# Altium PCB Ramp V1-4交流+微步進驅動器+電源.PCBDOC
Units mil, origin at the board's own origin, x right, y up, seen from the top; angles counter-clockwise.
Board outline 13794 x 4636 mil, 2 copper layers (Top Layer, Bottom Layer); 113 components, 119 nets, 585 pads, 118 vias.
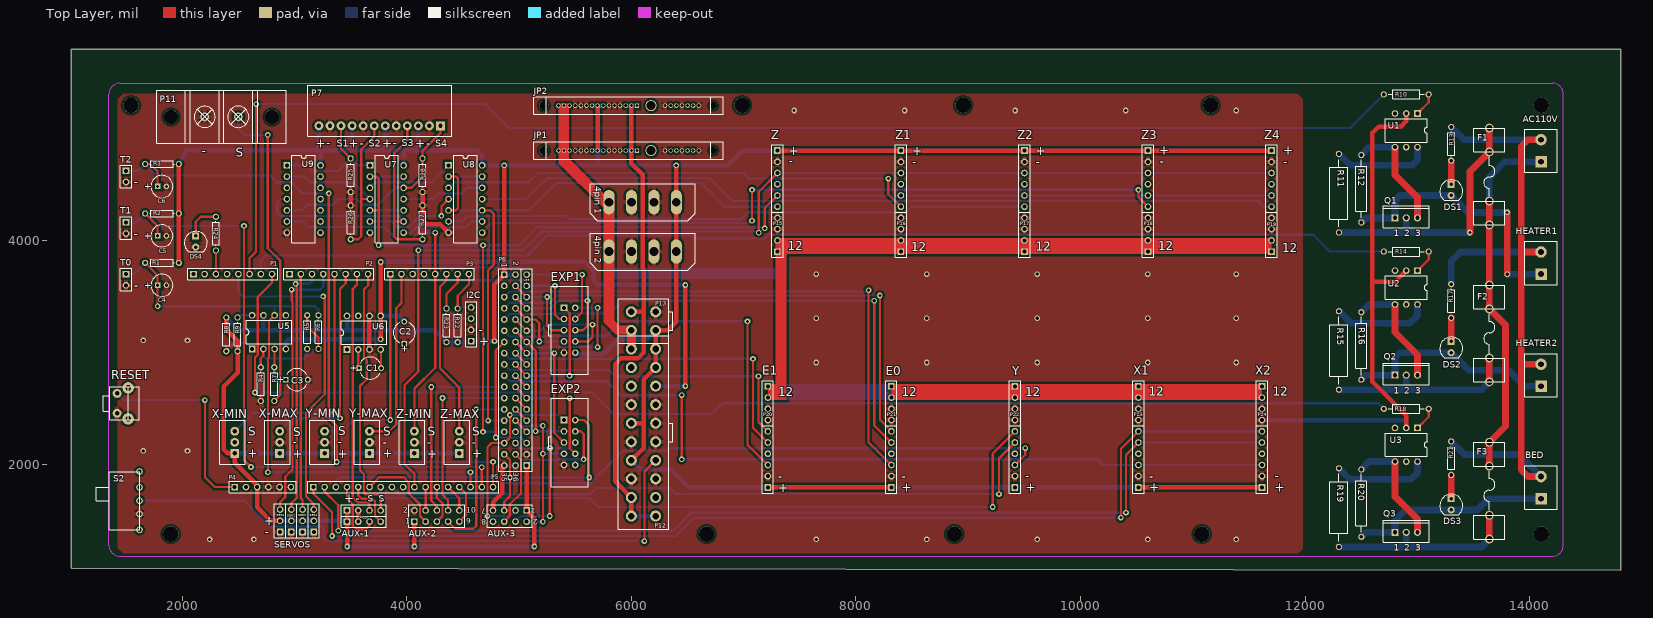
[diagram p0: Top Layer view]
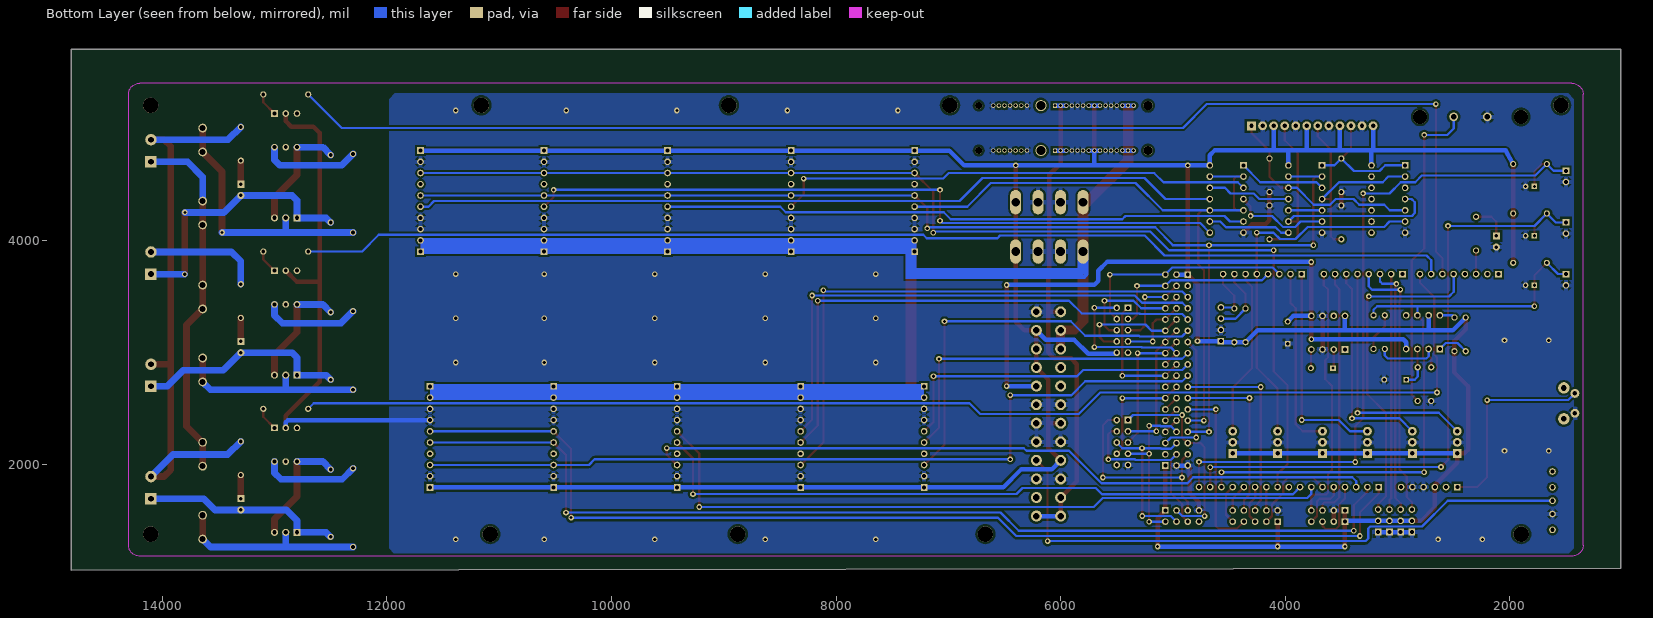
[diagram p1: Bottom Layer view, seen from below]

## Layer stack, top to bottom
Top Layer: signal copper 1.4
Dielectric: dielectric 12.6, FR-4, Dk 4.8
Bottom Layer: signal copper 1.4

## Board outline
1014,1080 1014,5700 14808,5700 14808,1064

## Design rules (kind name [scope] priority, off if disabled: settings)
Clearance [All] p1: gap=10
ComponentClearance [All] p1: gap=10 collisioncheckmode=0
HoleSize [All] p1: absolutevalues=TRUE maxlimit=150 minlimit=1 maxpercent=80.000 minpercent=20.000
PlaneConnect [All] p1: planeconnectstyle=Relief reliefexpansion=20 reliefentries=2 reliefconductorwidth=10 reliefairgap=10
PolygonConnect [All] p1: connectstyle=Relief reliefconductorwidth=40 reliefentries=4 polygonreliefangle="90 Angle"
RoutingVias [All] p1: holewidth=28 width=50 viastyle="Through Hole" minholewidth=28 minwidth=50 maxholewidth=28 maxwidth=50
SolderMaskExpansion [All] p1: expansion=4
TestPointUsage [All] p1: valid=0 allowmultiple=FALSE
Testpoint [All] p1: side=15 testpointundercomponent=TRUE minsize=40 maxsize=100 preferedsize=60 minholesize=0 maxholesize=40 preferedholesize=32 testpointgrid=1 style=1023 order=-539222988
Width AC110V [InNetClass('AC 110V')] p1: maxlimit=60 minlimit=10 preferedwidth=60
Width power [InNetClass('power')] p2: maxlimit=60 minlimit=10 preferedwidth=40
Width [All] p3: maxlimit=60 minlimit=10 preferedwidth=20
15 further rules are at their usual default settings.

## Classes and differential pairs
net class AC110V: NetAC110V_1 NetAC110V_2 NetBED_1 NetDS1_1 NetDS1_2 NetDS2_1 NetDS2_2 NetDS3_1 NetF1_1 NetF2_1 NetF3_1 NetQ1_3 NetQ2_3 NetQ3_3 NetR11_1 NetR15_1 NetR19_1
net class power: 3V3 +3-3 +12 -5 -12 GND VCC

## Components (designator, comment, footprint, x,y, rotation, side; value= is the part's Value field where it differs from the comment)
"4pin 1" "9090-4V" 9090-4V 6400,4340 r270 top
"4pin 2" "9090-4V" 9090-4V 6400,3900 r270 top
A-OUT "Header 4" HDR1X4 3467.72,1495.28 r0 top
AC110V "Header 2" 2PIN端子-1 14100,4700 r90 top
AUX-1 "Header 4" HDR1X4 3467.72,1595.28 r0 top
AUX-2 "Header 5X2" HDR2X5 4067.72,1495.28 r0 top
AUX-3 "Header 4X2" HDR2X4 5067.72,1595.28 r180 top
BED "Header 2" 2PIN端子-1 14100,1700 r90 top
C1 "Cap Pol1" CAPPR5-5x5 3672.72,2863.15 r0 top
C2 "Cap Pol1" CAPPR5-5x5 3977.72,3178.15 r90 top
C3 "Cap Pol1" CAPPR5-5x5 3019.72,2760 r0 top
C4 "Cap Pol1" CAPPR2-5x6.8 1820,3600 r0 top
C5 "Cap Pol1" CAPPR2-5x6.8 1820,4040 r0 top
C6 "Cap Pol1" CAPPR2-5x6.8 1820,4480 r0 top
DS1 "LED0" LED-2 13300,4500 r0 top
DS2 "LED0" LED-2 13300,3100 r0 top
DS3 "LED0" LED-2 13300,1700 r0 top
DS4 "LED0" LED-2 2120,4040 r0 top
E0 "Header 6" HDR1X6 8314.96,1800 r90 top
E1 "Header 6" HDR1X6 7214.96,1800 r90 top
EXP1 "Header 5X2" 10pin牛角公座 5400,3400 r270 top
EXP2 "Header 5X2" 10pin牛角公座 5400,2400 r270 top
F1 "Fuse 2" 保險絲座 13640,5000 r270 top
F2 "Fuse 2" 保險絲座 13640,2740 r90 top
F3 "Fuse 2" 保險絲座 13640,1340 r90 top
HEATER1 "Header 2" 2PIN端子-1 14100,3700 r90 top
HEATER2 "Header 2" 2PIN端子-1 14100,2700 r90 top
I2C "Header 4" HDR1X4 4572.72,3103.15 r90 top
JP1 "sata 7+15pin" "sata 7+15pin公座" 6100,4800 r180 top
JP2 "sata 7+15pin" "sata 7+15pin公座" 6100,5200 r180 top
P1 "Header 8" HDR1X8 2100,3700 r0 top
P2 "Header 8" HDR1X8 2955.91,3700 r0 top
P3 "Header 8" HDR1X8 3852.76,3700 r0 top
P4 "Header 6" HDR1X6 2467.72,1803.15 r0 top
P5 "Header 17" HDR1X17 3167.72,1803.15 r0 top
P6 "Header 18X2" HDR2X18 4867.72,3695.28 r270 top
P7 "Header 12" "2.5mm 90度 12pin" 4300,5020 r180 top
P11 "Header 2" 2PIN端子台有耳 2500,5100 r180 top
P12 "20pin ATX 公座" "4.2mm 20pin" 6215.54,1545.1 r90 top
P13 "4pin ATX 公座" "4.2mm 4pin" 6215.54,3198.65 r90 top
P15 "Header 4" HDR1X4 7300,3900 r90 top
P16 "Header 4" HDR1X4 8400,3900 r90 top
P17 "Header 4" HDR1X4 9500,3900 r90 top
P18 "Header 4" HDR1X4 10600,3900 r90 top
P19 "Header 4" HDR1X4 11700,3900 r90 top
P20 "Header 4" HDR1X4 7214.96,2700 r270 top
P21 "Header 4" HDR1X4 8314.96,2700 r270 top
P22 "Header 4" HDR1X4 9414.96,2700 r270 top
P23 "Header 4" HDR1X4 10514.96,2700 r270 top
P24 "Header 4" HDR1X4 11614.96,2700 r270 top
Q1 "BTA08" SFM-T3/X1.6V 12900,4200 r0 top
Q2 "BTA08" SFM-T3/X1.6V 12900,2800 r0 top
Q3 "BTA08" SFM-T3/X1.6V 12900,1400 r0 top
R1 "Res1" AXIAL-0.3 1820,3800 r180 top
R2 "Res1" AXIAL-0.3 1820,4240 r180 top
R3 "Res1" AXIAL-0.3 1820,4680 r180 top
R4 "Res1" AXIAL-0.3 2700,2720 r90 top
R5 "Res1" AXIAL-0.3 3112.72,3183.15 r90 top
R6 "Res1" AXIAL-0.3 3212.72,3183.15 r90 top
R7 "Res1" AXIAL-0.3 2820,2720 r90 top
R8 "Res1" AXIAL-0.3 2392.72,3163.15 r90 top
R9 "Res1" AXIAL-0.3 2492.72,3163.15 r90 top
R10 "Res1" AXIAL-0.4 12900,5300 r0 top
R11 "Res1" AXIAL-0.7 12300,4420 r270 top
R12 "Res1" AXIAL-0.6 12500,4460 r90 top
R13 "Res1" AXIAL-0.3 13300,4860 r90 top
R14 "Res1" AXIAL-0.4 12900,3900 r0 top
R15 "Res1" AXIAL-0.7 12300,3020 r270 top
R16 "Res1" AXIAL-0.6 12500,3060 r90 top
R17 "Res1" AXIAL-0.3 13300,3460 r90 top
R18 "Res1" AXIAL-0.4 12900,2500 r0 top
R19 "Res1" AXIAL-0.7 12300,1620 r270 top
R20 "Res1" AXIAL-0.6 12500,1660 r90 top
R21 "Res1" AXIAL-0.3 13300,2060 r90 top
R22 "Res1" AXIAL-0.3 4452.72,3243.15 r270 top
R23 "Res1" AXIAL-0.3 4352.72,3243.15 r270 top
R24 "Res1" AXIAL-0.3 2300,4060 r270 top
R25 "Res1" AXIAL-0.3 3500,4580 r90 top
R26 "Res1" AXIAL-0.3 3500,4160 r270 top
R27 "Res1" AXIAL-0.3 4140,4160 r270 top
R28 "Res1" AXIAL-0.3 4140,4580 r90 top
RESET "SW-PB" "SW DIP4-2" 1420,2460 r90 top
S2 "SW3" SW3-3 1620,1800 r270 top
SER1 "Header 3" HDR1X3 2871.72,1403.15 r90 top
SER2 "Header 3" HDR1X3 2971.72,1403.15 r90 top
SER3 "Header 3" HDR1X3 3071.72,1403.15 r90 top
SER4 "Header 3" HDR1X3 3171.72,1403.15 r90 top
T0 "Header 2" HDR1X2 1500,3700 r270 top
T1 "Header 2" HDR1X2 1500,4160 r270 top
T2 "Header 2" HDR1X2 1500,4620 r270 top
U1 "MOC3023" DIP-6 12900,4980 r180 top
U2 "MOC3023" DIP-6 12900,3580 r180 top
U3 "MOC3023" DIP-6 12900,2180 r180 top
U5 "OP07CP" DIP-8 2772.72,3183.15 r0 top
U6 "ICL7660" DIP-8 3617.72,3178.15 r0 top
U7 "SN74F00N" N014 3821.72,4368.15 r270 top
U8 "SN74F08N" N014 4521.72,4368.15 r270 top
U9 "SN74HC21N" N014 3081.72,4368.15 r270 top
U$9 "Header 18" HDR1X18 5067.72,1995.28 r90 top
X1 "Header 6" HDR1X6 10514.96,1800 r90 top
X2 "Header 6" HDR1X6 11614.96,1800 r90 top
X-MAX "Header 3" "2.5mm 3pin-2" 2867.72,2103.15 r90 top
X-MIN "Header 3" "2.5mm 3pin-2" 2467.72,2103.15 r90 top
Y "Header 6" HDR1X6 9414.96,1800 r90 top
Y-MAX "Header 3" "2.5mm 3pin-2" 3667.72,2103.15 r90 top
Y-MIN "Header 3" "2.5mm 3pin-2" 3267.72,2103.15 r90 top
Z "Header 6" HDR1X6 7300,4800 r270 top
Z1 "Header 6" HDR1X6 8400,4800 r270 top
Z2 "Header 6" HDR1X6 9500,4800 r270 top
Z3 "Header 6" HDR1X6 10600,4800 r270 top
Z4 "Header 6" HDR1X6 11700,4800 r270 top
Z-MAX "Header 3" "2.5mm 3pin-2" 4467.72,2103.15 r90 top
Z-MIN "Header 3" "2.5mm 3pin-2" 4067.72,2103.15 r90 top

## Footprints (in the part's own frame and the unit in brackets; to place one, negate y for a bottom-side part, rotate by r counter-clockwise, add the part's x,y. Pads: shape width x height; smd on the part's side, far side on the other; paste and mask are expansions set on the pad)
"2.5mm 3pin-2" [mm]
  rect 2x2 hole 1: 1(0,0)
  round 2 hole 1: 2(2.5,0) 3(5,0)
  silkscreen extent -2.5,-2.35 7.5,3.4
"2.5mm 90度 12pin" [mm]
  rect 2x2 hole 1: 1(0,0)
  round 2 hole 1: 2(2.5,0) 3(5,0) 4(7.5,0) 5(10,0) 6(12.5,0) 7(15,0) 8(17.5,0) 9(20,0) 10(22.5,0) 11(25,0) 12(27.5,0)
  silkscreen extent -2.5,-9.2 30,2.3
2PIN端子-1 [mm]
  rect 2.6x2.6 hole 1.3: 1(0,0)
  round 2.6 hole 1.3: 2(5,0)
  silkscreen extent -2.4,-3.7 7.4,3.7
2PIN端子台有耳 [mm]
  round 3.2 hole 3.2: 0(-7.62,0) 0(15.24,0)
  round 2 hole 1.25: 1(0,0) 2(7.62,0)
  silkscreen extent -10.87,-6 18.49,6
"4.2mm 4pin" [mm]
  round 2.5 hole 1.5: 1(0,5.5) 2(4.2,5.5) 3(0,0) 4(4.2,0)
  silkscreen extent -2.95,-3.9 7.15,8.45
"4.2mm 20pin" [mm]
  round 2.5 hole 1.5: 1(0,5.5) 2(4.2,5.5) 3(8.4,5.5) 4(12.6,5.5) 5(16.8,5.5) 6(21,5.5) 7(25.2,5.5) 8(29.4,5.5) 9(33.6,5.5) 10(37.8,5.5) 11(0,0) 12(4.2,0) 13(8.4,0) 14(12.6,0) 15(16.8,0) 16(21,0) 17(25.2,0) 18(29.4,0) 19(33.6,0) 20(37.8,0)
  silkscreen extent -2.95,-3.9 40.75,8.45
10pin牛角公座 [mm]
  rect 1.5x1.5 hole 0.9: 1(0,0)
  round 1.5 hole 0.9: 2(0,2.54) 3(2.54,0) 4(2.54,2.54) 5(5.08,0) 6(5.08,2.54) 7(7.62,0) 8(7.62,2.54) 9(10.16,0) 10(10.16,2.54)
  silkscreen extent -4.92,-3.43 15.08,5.47
9090-4V [mm]
  oval 5.5x2.5 hole 2: 1(0,0) 2(0,-5.08) 3(0,-10.16) 4(0,-15.24)
  silkscreen extent -4.2,-19.52 4.2,4.28
AXIAL-0.3 [mm] "Resistor; 2 Leads"
  round 1.4 hole 0.85: 1(-3.81,0) 2(3.81,0)
  silkscreen extent -2.77,-0.76 2.77,0.76
AXIAL-0.4 [mm] "Resistor; 2 Leads"
  round 1.4 hole 0.85: 1(-5.08,0) 2(5.08,0)
  silkscreen extent -4.06,-1.02 4.06,1.02
AXIAL-0.6 [mm] "Variable Resistor; 2 Leads"
  round 1.4 hole 0.85: 1(-7.62,0) 2(7.62,0)
  silkscreen extent -6.6,-1.27 6.6,1.27
AXIAL-0.7 [mm] "Variable Resistor; 2 Leads"
  round 1.4 hole 0.85: 1(-8.89,0) 2(8.89,0)
  silkscreen extent -7.62,-2.03 7.62,2.03
CAPPR2-5x6.8 [mm] "Capacitor, Electrolytic, Radial; Body 5 x 6.8 mm (Dia.xH typ); Pin Spacing 2 mm (typ)"
  rect 1.25x1.25 hole 0.75: 1(-1,0)
  round 1.25 hole 0.75: 2(1,0)
  silkscreen extent -2.5,-2.5 2.5,2.5
CAPPR5-5x5 [mm] "Capacitor, Electrolytic, Radial; Body 5 x 5 mm (Dia.xH typ); Pin Spacing 5 mm (typ)"
  rect 1.25x1.25 hole 0.75: 1(-2.5,0)
  round 1.35 hole 0.8: 2(2.5,0)
  silkscreen extent -2.26,-2.5 2.27,2.5
DIP-6 [mm] "DIP; 6 Leads; Row Spacing 7.62 mm; Pitch 2.54 mm"
  rect 1.5x1.5 hole 0.9: 1(-2.54,-3.81)
  round 1.5 hole 0.9: 2(0,-3.81) 3(2.54,-3.81) 4(2.54,3.81) 5(0,3.81) 6(-2.54,3.81)
  silkscreen extent -4.7,-2.65 4.7,2.65
DIP-8 [mm] "DIP; 8 Leads; Row Spacing 7.62 mm; Pitch 2.54 mm"
  rect 1.5x1.5 hole 0.9: 1(-3.81,-3.81)
  round 1.5 hole 0.9: 2(-1.27,-3.81) 3(1.27,-3.81) 4(3.81,-3.81) 5(3.81,3.81) 6(1.27,3.81) 7(-1.27,3.81) 8(-3.81,3.81)
  silkscreen extent -5.15,-2.65 5.15,2.65
HDR1X2 [mm] "Connector; Header; 2 Position"
  rect 1.5x1.5 hole 0.9: 1(0,0)
  round 1.5 hole 0.9: 2(2.54,0)
  silkscreen extent -1.27,-1.27 3.81,1.27
HDR1X3 [mm] "Connector; Header; 3 Position"
  rect 1.5x1.5 hole 0.9: 1(0,0)
  round 1.5 hole 0.9: 2(2.54,0) 3(5.08,0)
  silkscreen extent -1.27,-1.27 6.35,1.27
HDR1X4 [mm] "Connector; Header; 4 Position"
  rect 1.5x1.5 hole 0.9: 1(0,0)
  round 1.5 hole 0.9: 2(2.54,0) 3(5.08,0) 4(7.62,0)
  silkscreen extent -1.27,-1.27 8.89,1.27
HDR1X6 [mm] "Connector; Header; 6 Position"
  rect 1.5x1.5 hole 0.9: 1(0,0)
  round 1.5 hole 0.9: 2(2.54,0) 3(5.08,0) 4(7.62,0) 5(10.16,0) 6(12.7,0)
  silkscreen extent -1.27,-1.27 13.97,1.27
HDR1X8 [mm] "Connector; Header; 8 Position"
  rect 1.5x1.5 hole 0.9: 1(0,0)
  round 1.5 hole 0.9: 2(2.54,0) 3(5.08,0) 4(7.62,0) 5(10.16,0) 6(12.7,0) 7(15.24,0) 8(17.78,0)
  silkscreen extent -1.27,-1.27 19.05,1.27
HDR1X17 [mm] "Connector; Header; 17 Position"
  rect 1.5x1.5 hole 0.9: 1(0,0)
  round 1.5 hole 0.9: 2(2.54,0) 3(5.08,0) 4(7.62,0) 5(10.16,0) 6(12.7,0) 7(15.24,0) 8(17.78,0) 9(20.32,0) 10(22.86,0) 11(25.4,0) 12(27.94,0) 13(30.48,0) 14(33.02,0) 15(35.56,0) 16(38.1,0) 17(40.64,0)
  silkscreen extent -1.27,-1.27 41.91,1.27
HDR1X18 [mm] "Connector; Header; 18 Position"
  rect 1.5x1.5 hole 0.9: 1(0,0)
  round 1.5 hole 0.9: 2(2.54,0) 3(5.08,0) 4(7.62,0) 5(10.16,0) 6(12.7,0) 7(15.24,0) 8(17.78,0) 9(20.32,0) 10(22.86,0) 11(25.4,0) 12(27.94,0) 13(30.48,0) 14(33.02,0) 15(35.56,0) 16(38.1,0) 17(40.64,0) 18(43.18,0)
  silkscreen extent -1.27,-1.27 44.45,1.27
HDR2X4 [mm] "Connector; Header; 4x2 Position"
  rect 1.5x1.5 hole 0.9: 1(0,0)
  round 1.5 hole 0.9: 2(0,2.54) 3(2.54,0) 4(2.54,2.54) 5(5.08,0) 6(5.08,2.54) 7(7.62,0) 8(7.62,2.54)
  silkscreen extent -1.27,-1.27 8.89,3.81
HDR2X5 [mm] "Connector; Header; 5x2 Position"
  rect 1.5x1.5 hole 0.9: 1(0,0)
  round 1.5 hole 0.9: 2(0,2.54) 3(2.54,0) 4(2.54,2.54) 5(5.08,0) 6(5.08,2.54) 7(7.62,0) 8(7.62,2.54) 9(10.16,0) 10(10.16,2.54)
  silkscreen extent -1.27,-1.27 11.43,3.81
HDR2X18 [mm] "Connector; Header; 18x2 Position"
  rect 1.5x1.5 hole 0.9: 1(0,0)
  round 1.5 hole 0.9: 2(0,2.54) 3(2.54,0) 4(2.54,2.54) 5(5.08,0) 6(5.08,2.54) 7(7.62,0) 8(7.62,2.54) 9(10.16,0) 10(10.16,2.54) 11(12.7,0) 12(12.7,2.54) 13(15.24,0) 14(15.24,2.54) 15(17.78,0) 16(17.78,2.54) 17(20.32,0) 18(20.32,2.54) 19(22.86,0) 20(22.86,2.54) 21(25.4,0) 22(25.4,2.54) 23(27.94,0) 24(27.94,2.54) 25(30.48,0) 26(30.48,2.54) 27(33.02,0) 28(33.02,2.54) 29(35.56,0) 30(35.56,2.54) 31(38.1,0) 32(38.1,2.54) 33(40.64,0) 34(40.64,2.54) 35(43.18,0) 36(43.18,2.54)
  silkscreen extent -1.27,-1.27 44.45,3.81
LED-2 [mm]
  rect 1.6x1.6 hole 0.8: 1(0,0)
  round 1.6 hole 0.8: 2(0,-2.54)
  silkscreen extent -2.56,-3.63 2.63,1.01
N014 [mm] "DIP; 14 Leads; Row Spacing 7.62 mm; Pitch 2.54 mm"
  rect 1.5x1.5 hole 0.9: 1(-7.62,-3.81)
  round 1.5 hole 0.9: 2(-5.08,-3.81) 3(-2.54,-3.81) 4(0,-3.81) 5(2.54,-3.81) 6(5.08,-3.81) 7(7.62,-3.81) 8(7.62,3.81) 9(5.08,3.81) 10(2.54,3.81) 11(0,3.81) 12(-2.54,3.81) 13(-5.08,3.81) 14(-7.62,3.81)
  silkscreen extent -9.85,-2.65 9.85,2.65
"sata 7+15pin公座" [mm]
  round 1.6 hole 1.6: 0(-15.975,0)
  round 2.5 hole 2: 1(-1.9,0)
  round 2.1 hole 2.1: 2(22.325,0)
  rect 1x1 hole 0.7: P1(1.28,0)
  round 1 hole 0.7: P2(2.55,0) P3(3.82,0) P4(5.09,0) P5(6.36,0) P6(7.63,0) P7(8.9,0) P8(10.17,0) P9(11.44,0) P10(12.71,0) P11(13.98,0) P12(15.25,0) P13(16.52,0) P14(17.79,0) P15(19.06,0) S1(-12.7,0) S2(-11.43,0) S3(-10.16,0) S4(-8.89,0) S5(-7.62,0) S6(-6.35,0) S7(-5.08,0)
  silkscreen extent -18.25,-2 24.6,2
SFM-T3/X1.6V [mm] "TO, Thru-Hole, Vertical, Heatsink Mounted; 3 In-Line Leads; Pitch 2.54 mm"
  rect 1.6x1.6 hole 1: 1(-2.54,0)
  round 1.6 hole 1: 2(0,0) 3(2.54,0)
  silkscreen extent -5.15,-2.2 5.15,2.7
SW3-3 [mm]
  round 1.5 hole 1: 1(0,0) 2(3,0) 3(6,0) 4(9.6,0) 5(-3.6,0)
  silkscreen extent -3.6,-9.8 9.6,0
"SW DIP4-2" [mm]
  round 2 hole 1: 1(4.5,0) 2(0,0)
  round 2.6 hole 1.3: 3(5.75,-2.5) 4(-1.25,-2.5)
  silkscreen extent -1.5,-5.05 6,3.15
保險絲座 [mm]
  round 2 hole 1.4: 1(0,0) 1(5.4,0) 2(16.5,0) 2(21.9,0)
  silkscreen extent 0,-3.5 21.9,3.5

## Part data
A-OUT AUX-1 I2C P15 P16 P17 P18 P19 P20 P21 P22 P23 P24: "Header, 4-Pin"
AC110V BED HEATER1 HEATER2 P11 T0 T1 T2: "Header, 2-Pin"
AUX-2 EXP1 EXP2: "Header, 5-Pin, Dual row"
AUX-3: "Header, 4-Pin, Dual row"
C1 C2 C3 C4 C5 C6: "Polarized Capacitor (Radial)"
DS1 DS2 DS3 DS4: "Typical INFRARED GaAs LED"
E0 E1 P4 X1 X2 Y Z Z1 Z2 Z3 Z4: "Header, 6-Pin"
F1 F2 F3: "Fuse"
P1 P2 P3: "Header, 8-Pin"
P5: "Header, 17-Pin"
P6: "Header, 18-Pin, Dual row"
P7: "Header, 12-Pin"
Q1 Q2 Q3: library part Triac, "Silicon Bidirectional Triode Thyristor"
R1 R2 R3 R4 R5 R6 R7 R8 R9 R10 R11 R12 R13 R14 R15 R16 R17 R18 R19 R20 R21 R22 R23 R24 R25 R26 R27 R28: "Resistor"
RESET: "Switch"
SER1 SER2 SER3 SER4 X-MAX X-MIN Y-MAX Y-MIN Z-MAX Z-MIN: "Header, 3-Pin"
U5: "Ultra-Low Offset Voltage Operational Amplifier"
U7: "Quadruple 2-Input Positive-NAND Gate"
U8: "Quadruple 2-Input Positive-AND Gate"
U9: "Dual 4-Input Positive-AND Gate"
U$9: "Header, 18-Pin"

## Free pads (board coordinates)
  round 137.8 hole 137.8: 0(14103.15,1384.25) 1(11079.53,1384.25) 2(8874.8,1384.25) 3(6670.08,1384.25) 4(6985.04,5203.15) 5(8953.54,5203.15) 6(1898.43,1384.25) 6(11158.27,5203.15) 7(1544.09,5203.15) 7(14103.15,5203.15)

## Via types
v1: diameter 50, hole 28, Top Layer to Bottom Layer, 118 vias

## Nets (pads, with @x,y where several pads share a name; then routed paths per layer and width w, separated by ;. In a path a pad name is that pad's centre, name@x,y a point inside that pad or via, vN(x,y) a via of type N, cw(c..) or ccw(c..) an arc to the next point about the centre after c; other vN are vias at no path point)
3V3: P4.2
+3-3: JP1.P1 JP1.P2 JP1.P3 JP2.P1 JP2.P2 JP2.P3 P12.1 P12.2 P12.11 P13.2 | length 4478.2
  Top Layer w40: P12.1 P12.2 5855,1854.46 5855,2897 5907,2949 6058,2949 6108,2999 6108,3743 6100,3751 6100,4585 5999.61,4685.39 JP2.P2 ; P13.2 6108,3364
  Bottom Layer w40: JP1.P3 JP1.P1 ; JP2.P3 JP2.P1 ; P12.1 P12.11
+12: "4pin 1.4" "4pin 2.4" JP1.P13 JP1.P14 JP1.P15 JP2.P13 JP2.P14 JP2.P15 P12.10 P13.1 P15.1 P15.2 P16.1 P16.2 P17.1 P17.2 P18.1 P18.2 P19.1 P19.2 P20.1 P20.2 P21.1 P21.2 P22.1 P22.2 P23.1 P23.2 P24.1 P24.2 | length 34162.9
  Top Layer w40: 5800,3900 5800,3259 5860.35,3198.65 P13.1 ; P15.1 P19.1 ; P15.2 P19.2 ; P21.2 P24.2 ; P21.1 P24.1
  Bottom Layer w40: JP1.P15 JP1.P13 ; JP2.P15 JP2.P13 ; 5770,3730 5770,3697 5789,3678 5827,3678 ; P20.2 P24.2 ; P20.1 P24.1 ; P15.1 P19.1 ; P15.2 P19.2
-5: C2.2 P12.18 U5.4 U6.5 | length 5851.7
  Top Layer w40: v1(3766.72,3120.15) U6.5 3767.72,3807.72 v1(3768,3808) ; v1(6481,2702.58) v1(6481,3603)
  Bottom Layer w40: U5.4 2922.72,3094.15 2948.72,3120.15 v1(3766.72,3120.15) ; U6.5 3926.14,3328.15 C2.2 ; v1(3768,3808) 5586.14,3808 5665,3729.14 5665,3639 5701,3603 v1(6481,3603) ; P12.18 v1(6481,2702.58)
-12: P12.12
A3: AUX-1.3 P2.7 | length 2234.2
  Top Layer w20: P2.7 3555.91,3606.34 3517.72,3568.15 3517.72,1711 3563.72,1665 3651.72,1665 3667.72,1649 AUX-1.3
A4: AUX-1.4 P2.8 | length 2296.7
  Top Layer w20: P2.8 3655.91,3601.34 3617.72,3563.15 3617.72,2960 3642.72,2935 3642.72,2763.15 3582.72,2703.15 3582.72,1955.15 3617.72,1920.15 3617.72,1754.28 3634,1738 3743.72,1738 3767.72,1714 AUX-1.4
A5: AUX-2.3 P5.6 | length 815.3
  Top Layer w20: P5.6 3754.57,1890 3971.87,1890 4017.72,1844.15 4017.72,1749 4117.72,1649 4117.72,1545.28 ; 4118.19,1544.8 AUX-2.3
A9: AUX-2.4 P5.11 | length 207.9
  Top Layer w20: AUX-2.4 P5.11
A10: AUX-2.5 P5.12 | length 349.3
  Top Layer w20: AUX-2.5 4317.72,1545.28 4317.72,1658.15 4267.72,1708.15 P5.12
A11: AUX-2.10 P5.13 | length 249.3
  Top Layer w20: P5.13 4467.72,1703.15 AUX-2.10
A12: AUX-2.9 P5.14 | length 357.6
  Top Layer w20: AUX-2.9 4527.72,1555.28 4527.72,1743.15 P5.14
CLK1: U8.3 Z1.6 | length 4287.2
  Top Layer w20: v1(8288,4550) 8288,4412 Z1.6
  Bottom Layer w20: U8.3 4421.57,4518 5084,4518 5165,4599 6998,4599 7047,4550 v1(8288,4550)
CLK2: U8.6 Z2.6 | length 5206.9
  Bottom Layer w20: U8.6 4491.15,4168.15 4541,4218 5423,4218 5452,4189 6979,4189 7040,4250 8447,4250 8497,4300 Z2.6
CLK3: U8.8 Z3.6 | length 6347.8
  Top Layer w20: v1(7074,4175) v1(7074,4450) ; v1(10515,4450) 10515,4385 Z3.6
  Bottom Layer w20: U8.8 4757.57,4154 7053,4154 v1(7074,4175) ; v1(7074,4450) v1(10515,4450)
CLK4: U8.11 Z4.6 | length 7212.1
  Bottom Layer w20: U8.11 5065.15,4368.15 5253,4556 6695,4556 6901,4350 11579,4350 11629,4300 Z4.6
D1: A-OUT.4 P5.5 | length 446.2
  Top Layer w20: P5.5 3567.72,1729.28 3597,1700 3691.72,1700 3717.72,1674 3717.72,1545.28 A-OUT.4
D2: A-OUT.3 P5.4 | length 578
  Top Layer w20: P5.4 3467.72,1701 3518,1650.72 3518,1460 3550,1428 3640,1428 3667.72,1455.72 A-OUT.3
D4: P1.5 SER4.3 | length 2930.8
  Top Layer w20: SER4.3 3171.72,1652.28 3102,1722 3102,2462.43 3268.72,2629.15 3268.72,3487.15 v1(3254.72,3501.15)
  Bottom Layer w20: P1.5 2500,3543 2541.85,3501.15 v1(3254.72,3501.15)
D5: P2.2 SER3.3 | length 2103.4
  Top Layer w20: P2.2 3055.91,1704 3071.72,1688.19 SER3.3
D6: P2.3 SER2.3 | length 2255.4
  Top Layer w20: SER2.3 2971.72,1659 3019.72,1707 3019.72,3603.15 v1(3009.72,3613.15)
  Bottom Layer w20: v1(3009.72,3613.15) 3136.06,3613.15 3155.91,3633 P2.3
D8: P1.8 R18.1 | length 11309.7
  Top Layer w20: v1(2648,2645) 2648,2956.28 2672.72,2981 2672.72,3496.15 2800,3623.43 P1.8
  Bottom Layer w20: v1(2648,2645) 2648.15,2645.15 5646.85,2645.15 5838,2454 6715,2454 6811,2550 12650,2550 R18.1
D9: P1.7 R14.1 | length 10298.8
  Bottom Layer w20: P1.7 2700,3824 2742,3866 5074,3866 5251,4043 6539,4043 6562,4020 7192,4020 7222,4050 12071,4050 12221,3900 R14.1
D10: P1.6 R10.1 | length 11792.1
  Top Layer w20: P1.6 2600,3841 2658,3899 v1(2658,5214)
  Bottom Layer w20: v1(2658,5214) 4698,5214 4911,5001 12401,5001 R10.1
D11: P2.4 SER1.3 | length 2410.1
  Top Layer w20: SER1.3 2871.72,1668.15 2917.72,1714.15 2917.72,1895.15 2983,1960.43 2983,3456 2974.72,3464.28 v1(2974.72,3561.15)
  Bottom Layer w20: v1(2974.72,3561.15) 3226.06,3561.15 3255.91,3591 P2.4
D12: P1.4
D16: EXP1.4 P3.3 U$9.18 | length 1988
  Top Layer w20: EXP1.4 5561,3361 v1(5561,3695.28)
  Bottom Layer w20: P3.3@4052.76,3709.11 P3.3 4110.91,3758.15 5004.84,3758.15 U$9.18 v1(5561,3695.28)
D17: EXP1.3 P3.4 U$9.17 | length 1563.4
  Top Layer w20: v1(5320,3595) 5320,3338 5358,3300 EXP1.3
  Bottom Layer w20: P3.4 4207.61,3645.15 5017.84,3645.15 U$9.17 v1(5320,3595)
D23: EXP1.5 P6.4 U$9.16 | length 745.1
  Top Layer w20: P6.4 U$9.16 ; v1(5249,3496) 5249,3242 5291,3200 EXP1.5
  Bottom Layer w20: U$9.16 v1(5249,3496)
D25: EXP1.6 P6.6 U$9.15 | length 1059.3
  Top Layer w20: P6.6 U$9.15 ; EXP1.6 5569,3200 5609,3240 v1(5609,3463)
  Bottom Layer w20: U$9.15 5282.28,3395.28 5350,3463 v1(5609,3463)
D27: EXP1.7 P6.8 U$9.14 | length 649.1
  Top Layer w20: P6.8 U$9.14 5146,3295.28 5180,3261.28 v1(5180,3100)
  Bottom Layer w20: v1(5180,3100) EXP1.7
D29: EXP1.8 P6.10 U$9.13 | length 1031.5
  Top Layer w20: P6.10 U$9.13 ; EXP1.8 5615,3100 5654,3139 v1(5654,3250)
  Bottom Layer w20: U$9.13 5190.28,3195.28 5245,3250 v1(5654,3250)
D31: EXP2.3 P6.12 U$9.12 | length 1222.2
  Top Layer w20: P6.12 5147.28,3015.72 v1(5147.28,2300.28)
  Bottom Layer w20: v1(5147.28,2300.28) 5399.72,2300.28 EXP2.3
D32: P6.13 U$9.3 | length 1178.3
  Top Layer w20: v1(4791.72,2245.15) 4791.72,3019.28 P6.13
  Bottom Layer w20: v1(4791.72,2245.15) 5017.84,2245.15 U$9.3
D33: EXP2.5 P6.14 U$9.11 | length 1221
  Top Layer w20: P6.14 U$9.11 ; v1(5314,2996) 5314,2286 EXP2.5
  Bottom Layer w20: U$9.11 5313.28,2995.28 v1(5314,2996) ; EXP2.5@5399,2201 EXP2.5
D35: EXP1.2 P6.16 U$9.10 | length 1444.4
  Top Layer w20: P6.16 U$9.10 ; v1(5699,3050) v1(5699,3400)
  Bottom Layer w20: P6.16 5017.59,3045.15 5275,3045.15 5279.85,3050 v1(5699,3050) ; EXP1.2 v1(5699,3400)
D37: EXP1.1 P6.18 U$9.9 | length 1149.1
  Top Layer w20: P6.18 U$9.9 ; EXP1.1 5450,3350 v1(5450,2795)
  Bottom Layer w20: U$9.9 v1@5449.72,2795.28
D39: P6.20 U$9.8 | length 141.4
  Top Layer w20: P6.20 U$9.8
D40: AUX-2.6 P6.21 | length 1770.1
  Top Layer w20: v1(4217.72,2694.15) 4217.72,1683 4267.72,1633 AUX-2.6
  Bottom Layer w20: v1(4217.72,2694.15) 4866.59,2694.15 P6.21
D41: EXP2.8 P6.22 U$9.7 | length 1039.4
  Top Layer w20: P6.22 U$9.7 ; v1(5450,2595) 5450,2150 EXP2.8
  Bottom Layer w20: U$9.7 v1(5450,2595)
D42: AUX-2.8 P6.23 | length 1571.9
  Top Layer w20: v1(4317.72,2596.15) 4317.72,1736.15 4367.72,1686.15 AUX-2.8
  Bottom Layer w20: v1(4317.72,2596.15) 4866.84,2596.15 P6.23
D43: P6.24 U$9.6 | length 141.4
  Top Layer w20: P6.24 U$9.6
D44: AUX-2.7 P6.25 | length 1575.4
  Top Layer w20: AUX-2.7 4431.84,1431.15 4591.72,1431.15 4617.72,1457.15 v1(4617.72,2495.15)
  Bottom Layer w20: v1(4617.72,2495.15) 4867.59,2495.15 P6.25
D45: P6.26 U$9.5 | length 141.4
  Top Layer w20: P6.26 U$9.5
D47: P6.28 U$9.4 | length 141.4
  Top Layer w20: P6.28 U$9.4
D49: AUX-3.2 EXP2.7 P6.30 | length 1452.5
  Top Layer w20: v1(5212,1495) v1(5212,2349)
  Bottom Layer w20: P6.30 5017.59,2345.15 5108.15,2345.15 5112,2349 v1(5212,2349) ; AUX-3.2@5067.99,1495 v1(5212,1495) ; v1(5212,2100) EXP2.7
D53: AUX-3.6 EXP2.4 P6.34 | length 1623.6
  Top Layer w20: AUX-3.6 4917.72,1545.28 4917.72,1650 5018,1750.28 5018,2044.99 P6.34 ; EXP2.4 5550,2300 5575,2275 v1(5575,2050)
  Bottom Layer w20: P6.34 5017.99,2045 5332,2045 5337,2050 v1(5575,2050)
E0-DIR: E0.5 P6.9 | length 4690.7
  Top Layer w20: v1(8163,3463) 8163,2351.96 E0.5
  Bottom Layer w20: P6.9 4917.44,3345 5293,3345 5298,3350 5812,3350 5925,3463 v1(8163,3463)
E0-EN: E0.3 P6.5 | length 4909.5
  Top Layer w20: v1(8112,3556) 8112,2202.96 E0.3
  Bottom Layer w20: P6.5 4917.44,3545 8101,3545 v1(8112,3556)
E0-STEP: E0.6 P6.7 | length 4643.6
  Top Layer w20: v1(8213,3509) 8213,2401.96 E0.6
  Bottom Layer w20: P6.7 4917.44,3445 5276,3445 5340,3509 v1(8213,3509)
E1-DIR: E1.5 P6.15 | length 3035.8
  Top Layer w20: v1(7082.85,2945.15) 7082.85,2332.11 E1.5
  Bottom Layer w20: P6.15 4917.84,2945.15 v1(7082.85,2945.15)
E1-EN: E1.3 P6.11 | length 3596.6
  Top Layer w20: v1(7034,3279) 7034,2180.96 E1.3
  Bottom Layer w20: P6.11 4917.99,3145 5296,3145 5301,3150 5780,3150 5909,3279 v1(7034,3279)
E1-STEP: E1.6 P6.17 | length 2832.3
  Top Layer w20: v1(7132,2790) 7132,2382.96 E1.6
  Bottom Layer w20: P6.17 4917.84,2845.15 5798.85,2845.15 5854,2790 v1(7132,2790)
GND: "4pin 1.2" "4pin 1.3" "4pin 2.2" "4pin 2.3" A-OUT.2 AUX-1.2 AUX-2.2 AUX-3.7 C2.1 C3.2 C4.2 C5.2 C6.2 DS4.2 E0.2 E1.2 EXP1.9 EXP2.9 I2C.2 JP1.P4 JP1.P5 JP1.P6 JP1.P10 JP1.P11 JP1.P12 JP1.S1 JP1.S4 JP1.S7 JP2.P4 JP2.P5 JP2.P6 JP2.P10 JP2.P11 JP2.P12 JP2.S1 JP2.S4 JP2.S7 P4.4 P4.5 P6.35 P6.36 P7.2 P7.5 P7.8 P7.11 P11.2 P12.3 P12.5 P12.7 P12.13 P12.15 P12.16 P12.17 P13.4 P15.3 P15.4 P16.3 P16.4 P17.3 P17.4 P18.3 P18.4 P19.3 P19.4 P20.3 P20.4 P21.3 P21.4 P22.3 P22.4 P23.3 P23.4 P24.3 P24.4 R4.1 R25.1 R26.1 R27.1 R28.1 RESET.2 S2.3 SER1.1 SER2.1 SER3.1 SER4.1 T0.2 T1.2 T2.2 U1.2 U2.2 U3.2 U6.3 U6.6 U7.7 U8.7 U9.7 U$9.2 X1.2 X2.2 X-MAX.2 X-MIN.2 Y-MAX.2 Y-MIN.2 Y.2 Z1.2 Z2.2 Z3.2 Z4.2 Z-MAX.2 Z-MIN.2 Z.2 | length 6746.8
  Top Layer w40: R26.1 R25.1 ; A-OUT.2 AUX-1.2 ; U6.3 U6.6 ; R28.1 4140,4180 4178.17,4141.83 4298.04,4141.83 U8.7 ; AUX-3.7 4767.72,1668.72 4848,1749 4848,1975.56 P6.35 ; 12599,3630 12800,3630 U2.2 ; U3.2 12900,2440 12599,2741 12599,4959 12653,5013 12850,5013 12900,5063 U1.2
  Bottom Layer w40: SER1.1 SER4.1 ; U7.7@3666.87,4073 U7.7 ; P6.35 P6.36 ; P24.4 12880,2400 12900,2380 U3.2
  other v1: 2244.09,1337.8 2637.8,1337.8 7645.67,1337.8 8629.92,1337.8 9614.17,1337.8 10598.43,1337.8 11385.83,1337.8 1653.54,2125.2 2047.24,2125.2 7645.67,2912.6 8629.92,2912.6 9614.17,2912.6 10598.43,2912.6 11385.83,2912.6 1653.54,3109.45 2047.24,3109.45 7645.67,3306.3 8629.92,3306.3 9614.17,3306.3 10598.43,3306.3 11385.83,3306.3 7645.67,3700 8629.92,3700 9614.17,3700 10598.43,3700 11385.83,3700 7448.82,5156.69 8433.07,5156.69 9417.32,5156.69 10401.57,5156.69 11385.83,5156.69
MISO: AUX-3.3 EXP2.1 P6.31 | length 1823.7
  Top Layer w20: v1(4717.72,1545.15) 4717.72,2159 4753.99,2195.28 P6.31 4918,2245.56 v1(4918,2445)
  Bottom Layer w20: v1(4717.72,1545.15) 4917.59,1545.15 AUX-3.3 ; v1@4916,2443 v1(4918,2445) 5355,2445 EXP2.1
MOSI: AUX-3.4 EXP2.6 P6.32 | length 1505.8
  Top Layer w20: v1(5273.25,1545.75) v1@5273.25,2148.25
  Bottom Layer w20: AUX-3.4 5018.19,1545.75 v1(5273.25,1545.75) v1@5274,1545 ; P6.32 5017.84,2145.15 5103.15,2145.15 5108,2150 5450,2150 EXP2.6
  other v1: 5275,2150
NetAC110V_1: AC110V.1 F1.2 F2.2 F3.2 | length 3209.8
  Top Layer w60: F3.2@13640,1989.61 13640,2202.2 13783,2345.2 13783,3246.61 13640,3389.61 F1.2@13640,4350.39
  Bottom Layer w60: F1.2@13640,4350.39 13640,4565 13775,4700 AC110V.1
NetAC110V_2: AC110V.2 BED.2 HEATER1.2 HEATER2.2 R13.2 R17.2 R21.2 | length 6444.2
  Top Layer w60: 13925.15,2896.85 HEATER2.2 ; 13927.85,3896.85 HEATER1.2 ; BED.2 13984.15,1896.85 13924,1957 13924,4838 13982.85,4896.85 AC110V.2
  Bottom Layer w60: R21.2 13417,2093 13903.85,2093 BED.2 ; R17.2 13300,3814 13382.85,3896.85 HEATER1.2 ; R13.2 13413.15,4896.85 AC110V.2
NetBED_1: BED.1 DS3.2 Q3.1 R20.1 | length 1802.9
  Bottom Layer w60: R20.1 12540,1400 Q3.1 12800,1506 12894,1600 13531,1600 13631,1700 BED.1
NetC1_1: C1.1 U6.2 | length 167.7
  Top Layer w20: U6.2 3567.72,2869.72 C1.1
NetC1_2: C1.2 U6.4 | length 166.4
  Top Layer w20: U6.4 3771.14,3024.72 C1.2
NetC3_1: C3.1 R7.2 U5.3 | length 373.9
  Top Layer w20: R7.2 2822.72,2872.72 U5.3 ; R7.2@2822.72,2883.15 R7.2@2832.72,2873.15
  Bottom Layer w20: R7.2 2820,2787 2847,2760 C3.1
NetDS1_1: DS1.1 R13.1 | length 210
  Top Layer w60: DS1.1 R13.1
NetDS1_2: DS1.2 HEATER1.1 Q1.1 R12.1 | length 2403.3
  Top Layer w60: v1(13798,4249) 13799,4248 v1(13799,3699)
  Bottom Layer w60: R12.1 12540,4200 Q1.1 12800,4357 12843,4400 DS1.2 13451,4249 v1(13798,4249) ; v1(13799,3699) HEATER1.1
NetDS2_1: DS2.1 R17.1 | length 210
  Top Layer w60: DS2.1 R17.1
NetDS2_2: DS2.2 HEATER2.1 Q2.1 R16.1 | length 1915.1
  Bottom Layer w60: R16.1 12540,2800 Q2.1 12800,2956 12844,3000 DS2.2 13456,2844 13812,2844 13956,2700 HEATER2.1
NetDS3_1: DS3.1 R21.1 | length 210
  Top Layer w60: DS3.1 R21.1
NetDS4_1: DS4.1 R24.1 | length 324.2
  Top Layer w20: DS4.1 2120,4166 2164,4210 R24.1
NetF1_1: F1.1 Q1.2 R11.2 | length 2298.7
  Top Layer w60: v1(13467,4070) 13467,4614.4 13640,4787.4 F1.1@13640,5000
  Bottom Layer w60: R11.2 v1(13467,4070) ; 12900,4070 Q1.2
NetF2_1: F2.1 Q2.2 R15.2 | length 1709.6
  Top Layer w60: F2.1@13640,2740 F2.1@13640,2952.6
  Bottom Layer w60: R15.2 13570,2670 F2.1@13640,2740 ; 12900,2672 Q2.2
NetF3_1: F3.1 Q3.2 R19.2 | length 1711.6
  Top Layer w60: F3.1@13640,1340 F3.1@13640,1552.6
  Bottom Layer w60: R19.2 13570,1270 F3.1@13640,1340 ; 12900,1270 Q3.2
NetP1_3: P1.3 R24.2 | length 210
  Top Layer w20: P1.3 R24.2
NetP11_1: P11.1 R7.1 | length 2825.7
  Top Layer w20: v1(2762,4939) 2762,3931 2872.72,3820.28 2872.72,2622.72 R7.1
  Bottom Layer w20: P11.1 2500,4997 2558,4939 v1(2762,4939)
NetP12_14: P12.14 S2.2 | length 5457.6
  Top Layer w20: v1(6116,1322) 6116,1941.63 P12.14
  Bottom Layer w20: S2.2 2553.11,1681.89 2782,1453 3243,1453 3261,1435 3261,1346 3285,1322 v1(6116,1322)
NetQ1_3: Q1.3 R12.2 U1.4 | length 1041.8
  Top Layer w60: U1.4 12800,4583 13000,4383 Q1.3
  Bottom Layer w60: R12.2 12570,4830 U1.4
NetQ2_3: Q2.3 R16.2 U2.4 | length 1041.8
  Top Layer w60: U2.4 12800,3182 13000,2982 Q2.3
  Bottom Layer w60: R16.2 12570,3430 U2.4
NetQ3_3: Q3.3 R20.2 U3.4 | length 1041.8
  Top Layer w60: U3.4 12800,1719 13000,1519 Q3.3
  Bottom Layer w60: R20.2 12570,2030 U3.4
NetR4_2: R4.2 R5.1 U5.2 | length 704
  Top Layer w20: R4.2 2700,2950.28 2722.72,2973 U5.2
  Bottom Layer w20: U5.2 2722.72,2969.43 2743,2949.15 3087.72,2949.15 3112.72,2974.15 R5.1
NetR5_2: R5.2 R6.1 | length 341.4
  Top Layer w20: R5.2 3112.72,3235.15 3212.72,3135.15 R6.1
NetR8_1: R8.1 U5.1 | length 282.1
  Bottom Layer w20: R8.1 2465.57,3086 2569.87,3086 U5.1
NetR9_2: R9.2 U5.8 | length 138.3
  Bottom Layer w20: R9.2 2512.72,3333.15 U5.8
NetR10_2: R10.2 U1.1 | length 211.4
  Top Layer w20: U1.1 13100,5230 R10.2
NetR11_1: R11.1 U1.6 | length 876.1
  Bottom Layer w60: R11.1 12402,4668 12952,4668 13000,4716 U1.6
NetR14_2: R14.2 U2.1 | length 211.4
  Top Layer w20: U2.1 13100,3830 R14.2
NetR15_1: R15.1 U2.6 | length 870.9
  Bottom Layer w60: R15.1 12407,3263 12931,3263 13000,3332 U2.6
NetR18_2: R18.2 U3.1 | length 211.4
  Top Layer w20: U3.1 13100,2430 R18.2
NetR19_1: R19.1 U3.6 | length 864.4
  Bottom Layer w60: R19.1 12397,1873 12944,1873 13000,1929 U3.6
NetU7_3: U7.3 U8.1 | length 782.8
  Bottom Layer w20: U7.3 3721.72,4518.15 4221.72,4518.15 U8.1
NetU7_6: U7.6 U8.4 | length 874.9
  Top Layer w20: v1(4308,4218) 4308,4304.43 U8.4
  Bottom Layer w20: U7.6 3863,4168.15 3913,4118.15 4017,4118.15 4116.85,4218 v1(4308,4218)
NetU7_8: U7.8 U8.9 | length 741.4
  Bottom Layer w20: U7.8 4036.15,4068.15 4086,4118 4528,4118 4578.15,4168.15 U8.9
NetU7_11: U7.11 U8.12 | length 741.4
  Bottom Layer w20: U7.11 4231,4368.15 4281,4418.15 4486.72,4418.15 4536.72,4468.15 U8.12
RESET: P4.1 RESET.1 | length 1796.2
  Top Layer w20: v1(2202,2578) 2202,1890 2288.85,1803.15 P4.1
  Bottom Layer w20: RESET.1 1479.17,2578 v1(2202,2578)
SCK: AUX-3.5 EXP2.2 P6.33 | length 1852.7
  Top Layer w20: AUX-3.5 4867.72,1673.72 4918,1724 4918,2044.99 P6.33 ; EXP2.2 5577,2400 5623,2354 v1(5623,1889)
  Bottom Layer w20: v1(4919,1889) v1(5623,1889)
SCL: I2C.4 P3.8 R22.1 | length 472.4
  Top Layer w20: R22.1 4452.72,3507.15 4552.76,3607.19 P3.8
  Bottom Layer w20: R22.1 4462.72,3403.15 I2C.4
SDA: I2C.3 P3.7 R23.1 | length 605.6
  Top Layer w20: R23.1 4352.72,3524.15 4452.76,3624.19 P3.7
  Bottom Layer w20: R23.1 4442.72,3303.15 I2C.3
SW1: P7.10 R25.2 U7.1 U9.1 | length 1158.2
  Top Layer w20: P7.10 3414.17,4815.83 R25.2
  Bottom Layer w20: U9.1 3109.72,4668.15 3159.72,4618.15 3388.15,4618.15 R25.2 3561.85,4668.15 U7.1
SW2: P7.7 R26.2 U7.4 U9.2 | length 2037
  Top Layer w20: R26.2 3567,4010 3594,4037 3594,4810 3709.45,4925.45 P7.7 ; 3594,4367 3595.15,4368.15 U7.4
  Bottom Layer w20: U9.2 3081.72,4568.15 3131.72,4518.15 3521.72,4518.15 U7.4
SW3: P7.4 R27.2 U7.9 U9.4 | length 2728.7
  Top Layer w20: 3888.15,4168.15 U7.9 ; P7.4 4004.72,4892.72 3888,4776 3888,4034 3912,4010 R27.2
  Bottom Layer w20: U9.4 2876.15,4368.15 2846.72,4338.72 2846.72,4243.15 2871.72,4218.15 3921.72,4218.15 U7.9
SW4: P7.1 R28.2 U7.12 U9.5 | length 1893.9
  Top Layer w20: U7.12 4041.87,4468.15 4140,4566.28 4140,4797 4300,4957 P7.1
  Bottom Layer w20: U9.5 3069,4268.15 3119,4318.15 3340.15,4318.15 3391,4369 3550.87,4369 3601.72,4318.15 3745,4318.15 3895,4468.15 U7.12
T0: C4.1 P5.15 R1.2 R6.2 T0.1 U5.6 | length 5576.8
  Top Layer w20: R1.2 1780.63,3689.37 C4.1 ; v1(1781,3414) C4.1@1781,3600 ; v1(2763,1935) 2763,2948.28 2772.72,2958 2772.72,3283.15 U5.6 ; P5.15 v1(4567.72,1935.15)
  Bottom Layer w20: T0.1 1570,3700 R1.2 ; v1(1781,3414) 3180,3414 3212.72,3381.28 R6.2 ; v1(2763,1935) v1(4567.72,1935.15) ; U5.6 2822.72,3413.72
T1: C5.1 P5.16 R2.2 T1.1 | length 5779.9
  Top Layer w20: R2.2 1780.63,4129.37 C5.1 ; v1(2550,4129) 2550,2044.87 v1(2612.95,1981.92) ; P5.16 v1(4667.72,1980.15)
  Bottom Layer w20: T1.1 1590,4160 R2.2 1781,4129 v1(2550,4129) ; v1(2612.95,1981.92) v1(4667.72,1980.15)
T2: C6.1 P5.17 R3.2 T2.1 | length 6249.3
  Top Layer w20: R3.2 1716,4680 1780.63,4615.37 C6.1 ; v1(3306,4419) 3306,2417 3376,2347 v1(3376,2027) ; P5.17 v1(4767.72,2027.15)
  Bottom Layer w20: T2.1 1610,4620 R3.2 1773,4577 2783,4577 2842,4518 2971,4518 3071,4418 3305,4418 v1(3306,4419) ; v1(3376,2027) v1(4767.72,2027.15)
VCC: "4pin 1.1" "4pin 2.1" A-OUT.1 AUX-1.1 AUX-2.1 AUX-3.1 E0.1 E1.1 EXP1.10 I2C.1 JP1.P7 JP1.P8 JP1.P9 JP2.P7 JP2.P8 JP2.P9 P4.3 P6.1 P6.2 P7.3 P7.6 P7.9 P7.12 P12.4 P12.6 P12.19 P12.20 P13.3 R1.1 R2.1 R3.1 R8.2 R9.1 R22.2 R23.2 SER1.2 SER2.2 SER3.2 SER4.2 U5.7 U6.8 U7.14 U8.14 U9.14 U$9.1 X1.1 X2.1 X-MAX.1 X-MIN.1 Y-MAX.1 Y-MIN.1 Y.1 Z1.1 Z2.1 Z3.1 Z4.1 Z-MAX.1 Z-MIN.1 Z.1 | length 40996.3
  Top Layer w40: R1.1 R3.1 ; R8.2 2392.72,3207.15 2492.72,3107.15 2492.72,2821.72 2372,2701 2372,2137 2405.85,2103.15 2467.72,2103.15 2467.72,2020.15 2667.72,1820.15 2667.72,1622.43 2787,1503.15 SER1.2 ; AUX-1.1 3467.8,1495.28 v1(3468,1274) ; v1(4067.72,1273.72) AUX-2.1 ; v1(4780.72,3103.15) 4780.72,3608.28 P6.1 v1(4868,4668.15) ; U$9.1 AUX-3.1 5136,1526.99 v1(5136,1274) ; JP1.P8 JP2.P8 ; P12.4 6108,2150.17 6108,2760.4 P12.19 P13.3 6322.65,3198.65 6400,3276 v1(6400,4668) ; P12.6 6107.87,2371.87 6108,2372 ; E1.1 E0.1 ; Z.1 Z4.1 ; X1.1 X2.1
  Bottom Layer w40: R3.1 2037,4801 2037.15,4801.15 4628.85,4801.15 4671.72,4758.28 U8.14 6860.15,4668.15 6992,4800 Z4.1 ; R8.2 2505.87,3200 4245.87,3200 R23.2 4562.72,3093.15 I2C.1 v1(4780.72,3103.15) ; X-MIN.1@2467.72,2103.15 Z-MAX.1@4467.72,2103.15 ; 2722.72,3200.28 U5.7 ; SER1.2 3459.84,1503.15 A-OUT.1 ; 3217.32,4801.32 P7.12 ; U9.14 3231.72,4798.72 ; 3467.72,3200.28 U6.8 ; v1(3468,1274) v1(5136,1274) ; 3512.6,4801.4 P7.9 ; 3807.87,4801.15 P7.6 ; U7.14 3971.72,4798.72 ; 4103.15,4801.15 P7.3 ; P6.1 P6.2 ; EXP1.10 5509,2991 5755,2991 5880,3116 6132.89,3116 P13.3 ; JP1.P9 JP1.P7 ; JP2.P9 JP2.P7 ; 5699.61,4668.54 JP1.P8 ; P12.4 6080.17,1960 6352,1960 6512,1800 X2.1
VIN: P4.6
X-DIR: P5.2 X1.5 X2.5 | length 9290.9
  Top Layer w20: P5.2 3267.72,1764.28 3390,1642 v1(3390,1414) ; v1(10404,1576) 10404,2089.04 X1.5
  Bottom Layer w20: v1(3390,1414) 6373,1414 6535,1576 v1(10404,1576) ; X1.5 X2.5
X-EN: P6.19 X1.3 X2.3 | length 7411.7
  Top Layer w20: v1(6449,2050) v1(6449,2622)
  Bottom Layer w20: P6.19 4917.84,2745.15 5779.85,2745.15 5903,2622 v1(6449,2622) ; v1(6449,2050) 10150,2050 10200,2000 X2.3
X-MAX: P2.6 X-MAX.3 | length 1890.8
  Top Layer w20: v1(3404.72,2415.15) 3404.72,3566.15 3455.91,3617.34 P2.6
  Bottom Layer w20: X-MAX.3 2982.87,2415.15 v1(3404.72,2415.15)
X-MIN: P2.5 X-MIN.3 | length 2192.6
  Top Layer w20: v1(3355.72,2464.15) 3356.72,2465.15 3356.72,3699.19 P2.5
  Bottom Layer w20: X-MIN.3 2631.87,2464.15 v1(3355.72,2464.15)
X-STEP: P5.1 X1.6 X2.6 | length 9529.6
  Top Layer w20: P5.1 3167.72,1745.15 3335,1577.87 v1(3335,1368) ; v1(10359,1531) 10359,2144.04 X1.6
  Bottom Layer w20: v1(3335,1368) 6395,1368 6558,1531 v1(10359,1531) ; X1.6 X2.6
Y-DIR: P5.8 Y.5 | length 5993.4
  Top Layer w20: v1(9273,1741) 9273,2058.04 Y.5
  Bottom Layer w20: P5.8 3930.72,1740.15 5632.15,1740.15 5686,1794 6339,1794 6392,1741 v1(9273,1741)
Y-EN: P5.3 Y.3 | length 6545.2
  Top Layer w20: Y.3 9507,2092.04 v1(9507,2150)
  Bottom Layer w20: P5.3 3367.72,1854.72 3403,1890 4818,1890 4871,1837 5636,1837 5925,2126 6304,2126 6328,2150 v1(9507,2150)
Y-MAX: P3.2 Y-MAX.3 | length 1630.6
  Top Layer w20: Y-MAX.3 3844.57,2300 3905.72,2361.15 3905.72,3395.96 3952.76,3443 P3.2 P3.2@3943.87,3700
Y-MIN: P3.1 Y-MIN.3 | length 1926.3
  Top Layer w20: v1(3852.72,2400.15) P3.1
  Bottom Layer w20: Y-MIN.3 3423.57,2300 3523.72,2400.15 v1(3852.72,2400.15)
Y-STEP: P5.7 Y.6 | length 6315.5
  Top Layer w20: v1(9218,1626) 9218,2103.04 Y.6
  Bottom Layer w20: P5.7 3767.72,1741.28 3803,1706 5624,1706 5704,1626 v1(9218,1626)
Z-DIR: P6.29 U7.2 U7.5 U7.10 U7.13 Z1.5 Z2.5 Z3.5 Z4.5 Z.5 | length 11453.7
  Top Layer w20: U7.5 3749.28,4268.15 ; U7.2 3728.72,4568.15 3749.28,4547.58 v1(3749.28,3957.28) ; v1(4678.72,2295.15) v1(4678.72,3957.28) ; v1(7188,4107) 7188,4288 Z.5
  Bottom Layer w20: U7.5 U7.10 ; U7.2 U7.13 ; v1(3749.28,3957.28) 5000.28,3957.28 5000.28,3959.28 5157,4116 7179,4116 v1(7188,4107) ; v1(4678.72,2295.15) P6.29@4867.59,2295.15 ; Z.5 Z4.5
Z-EN: P5.10 Z1.3 Z2.3 Z3.3 Z4.3 Z.3 | length 10302.7
  Top Layer w20: P5.10 4067.72,1919.15 3979.72,2007.15 3979.72,2710 4103,2833.28 v1(4103,3912) ; v1(7134,4068) 7134,4434 Z.3
  Bottom Layer w20: v1(4103,3912) 5034,3912 5202,4080 7122,4080 v1(7134,4068) ; Z.3 Z4.3
Z-MAX: P3.6 Z-MAX.3 | length 1494.9
  Top Layer w20: P3.6 4352.76,3644.19 4295.72,3587.15 4295.72,2861 4467.72,2689 Z-MAX.3
Z-MIN: P3.5 U9.6 Z-MIN.3 | length 3255.2
  Top Layer w20: Z-MIN.3 4067.72,2681 4252.76,2866.04 P3.5 ; P3.5@4252.92,3700 v1(4253,4069)
  Bottom Layer w20: U9.6 3071,4168.15 3121,4118.15 3801.85,4118.15 3908,4012 4047,4012 4104,4069 v1(4253,4069)
Z-STEP: P6.27 U8.2 U8.5 U8.10 U8.13 Z.6 | length 5981.4
  Top Layer w20: U8.5 4435.15,4268.15 4455,4288 4455,4548.15 4435,4568.15 U8.2 ; U8.10 4672.87,4267 4744,4267 4775,4236 4775,3786.28 4723.72,3735 v1(4723.72,2395.15)
  Bottom Layer w20: U8.5 5091.15,4268.15 5333,4510 6621,4510 6831,4300 Z.6 ; U8.2 U8.13 ; v1(4723.72,2395.15) 4867.59,2395.15 P6.27
pads on no net: AUX-3.8 E0.4 E1.4 EXP2.10 JP1.0 JP1.1 JP1.2 JP1.S2 JP1.S3 JP1.S5 JP1.S6 JP2.0 JP2.1 JP2.2 JP2.S2 JP2.S3 JP2.S5 JP2.S6 P1.1 P1.2 P2.1 P5.9 P6.3 P11.0 P12.8 P12.9 RESET.3 RESET.4 S2.1 S2.4 S2.5 U1.3 U1.5 U2.3 U2.5 U3.3 U3.5 U5.5 U6.1 U6.7 U9.3 U9.8 U9.9 U9.10 U9.11 U9.12 U9.13 X1.4 X2.4 Y.4 Z1.4 Z2.4 Z3.4 Z4.4 Z.4

## Polygon pours and split planes (outlines as drawn)
GND on Top Layer (solid, remove dead copper): 1480,5309 1428,5257 1428,1258 1473,1213 11937,1213 11980,1256 11980,5257 11929,5308 1480,5308
GND on Bottom Layer (solid, remove dead copper): 1429.53,1257.47 1481.53,1205.47 11929.53,1205.47 11980.53,1256.47 11980.53,5257.47 11929.53,5308.47 1479.53,5308.47 1428.53,5257.47 1428.53,1257.47

## Keep-outs
Keep-Out Layer:
  lines w10: 1347.24,1300 1347.24,5203.15 ; 1347.24,1287.4 ccw(c1447.24,1287.4) 1447.24,1187.4 14200,1187.4 ccw(c14200,1287.4) 14300,1287.4 14300,5300 ccw(c14200,5300) 14200,5400 1447.24,5400 ccw(c1447.24,5300) 1347.24,5300 1347.24,1287.4

## Other copper
Top Layer:
  region net +12: 5860.35,3161 5916.22,3216.86 5806.16,3326.92 5750.3,3271.06
  region net +12: 6016,3161 6016,3240 5860.35,3240 5860.35,3161
  rectangle net +12: 5960,3013 6039,3198.65
  rectangle net +12: 5750.3,3271.06 5849,3910
  region net +12: 7381,2719 7214.96,2719 7214.96,2580 7381,2580
  region net +12: 7383,2580 7383,4018 7284,4018 7284,2580
  rectangle net +12: 5752,3857 5848,4374
  rectangle net +12: 5350,4688 5446,5219
  region net +12: 5756.5,4281.5 5824.38,4349.38 5417.88,4755.88 5350,4688
  rectangle net +12: 7300,3900 11700,4000
  rectangle net +12: 8314.96,2600 11614.96,2700
Bottom Layer:
  region net +12: 7380,3708 7380,4019 7281,4019 7281,3708
  region net +12: 5849,3699 5849,3928 5750,3928 5750,3699
  rectangle net +12: 5796,3657 7380,3756
  rectangle net +12: 7214.96,2600 11614.96,2700
  rectangle net +12: 7300,3900 11700,4000

## Silkscreen, mask and mechanical layers (free items; w line width, h text height)
Top Overlay:
  text "S3" at 3954,4839 h60.63
  text "S1" at 3374,4835 h60.63
  text "S2" at 3660,4835 h60.63
  text "S4" at 4253,4835 h60.63
  text "-" at 3877,4831 h78.74
  text "-" at 3284,4829 h78.74
  text "-" at 3580,4827 h78.74
  text "+" at 3189,4826 h78.74
  text "+" at 3781,4826 h78.74
  text "+" at 3481,4825 h78.74
  text "-" at 4173,4825 h78.74
  text "+" at 4075,4824 h78.74
  text "+" at 10701,4762 h78.74
  text "+" at 11804,4762 h78.74
  text "+" at 7401,4760 h78.74
  text "+" at 8499,4760 h78.74
  text "-" at 2176,4757 h78.74
  text "+" at 9601,4756 h78.74
  text "S" at 2476,4746 h78.74
  text "-" at 7401,4668 h78.74
  text "-" at 10704,4664 h78.74
  text "-" at 8501,4660 h78.74
  text "-" at 9599,4658 h78.74
  text "-" at 11804,4658 h78.74
  text "-" at 1569,4481 h78.74
  text "-" at 1569,4020 h78.74
  text "12" at 7392,3910 h78.74
  text "12" at 10691,3910 h78.74
  text "12" at 9599,3908 h78.74
  text "12" at 8491,3904 h78.74
  text "12" at 11795,3893 h78.74
  text "-" at 1571,3561 h78.74
  text "-" at 4641,3164 h78.74
  text "+" at 4643,3062 h78.74
  text "12" at 11710,2618 h78.74
  text "12" at 10608,2616 h78.74
  text "12" at 7307,2614 h78.74
  text "12" at 8407,2614 h78.74
  text "12" at 9505,2612 h78.74
  text "S" at 3388,2265 h78.74
  text "S" at 3790,2261 h78.74
  text "S" at 4186,2261 h78.74
  text "S" at 2587,2260 h78.74
  text "S" at 4584,2260 h78.74
  text "S" at 2987,2258 h78.74
  text "-" at 2986,2166 h78.74
  text "-" at 2583,2165 h78.74
  text "-" at 3385,2165 h78.74
  text "-" at 3787,2163 h78.74
  text "-" at 4182,2163 h78.74
  text "-" at 4584,2161 h78.74
  text "+" at 2582,2066 h78.74
  text "+" at 4583,2066 h78.74
  text "+" at 3785,2063 h78.74
  text "+" at 2983,2061 h78.74
  text "+" at 3386,2061 h78.74
  text "+" at 4184,2061 h78.74
  text "-" at 11729,1864 h78.74
  text "-" at 9509,1862 h78.74
  text "-" at 8409,1860 h78.74
  text "-" at 7309,1858 h78.74
  text "-" at 10610,1858 h78.74
  text "+" at 11729,1762 h78.74
  text "+" at 8407,1760 h78.74
  text "+" at 9511,1760 h78.74
  text "+" at 10610,1760 h78.74
  text "+" at 7307,1758 h78.74
  text "S" at 3651.72,1671.15 h60
  text "S" at 3749.72,1671.15 h60
  text "+" at 3444.72,1664.15 h78.74
  text "-" at 3545.72,1662.15 h78.74
  text "+" at 2731.72,1462.15 h78.74
  text "-" at 2733.72,1364.15 h78.74
  text "SERVOS" at 2821.72,1263.15 h60

## Text inside footprints (layer, text, board x,y; h text height)
AUX-2: Top Overlay "10" at 4527.72,1575.28 h50; Top Overlay "9" at 4527.72,1475.28 h50; Top Overlay "1" at 3987.72,1475.28 h50; Top Overlay "2" at 3967.72,1575.28 h50
AUX-3: Top Overlay "2" at 5167.72,1515.28 h50 r180; Top Overlay "1" at 5147.72,1615.28 h50 r180; Top Overlay "7" at 4707.72,1615.28 h50 r180; Top Overlay "8" at 4707.72,1515.28 h50 r180
C1: Top Overlay "+" at 3493.58,2833.62 h59.06
C2: Top Overlay "+" at 4007.24,2999.02 h59.06 r90
C3: Top Overlay "+" at 2840.58,2730.47 h59.06
C4: Top Overlay "+" at 1663.5,3570.47 h59.06
C5: Top Overlay "+" at 1663.5,4010.47 h59.06
C6: Top Overlay "+" at 1663.5,4450.47 h59.06
P6: Top Overlay "36" at 4947.72,1935.28 h50 r270; Top Overlay "35" at 4847.72,1935.28 h50 r270; Top Overlay "1" at 4847.72,3795.28 h50 r270; Top Overlay "2" at 4947.72,3815.28 h50 r270
Q1: Top Overlay "3" at 12980.32,4035.63 h59.06; Top Overlay "2" at 12880.32,4035.63 h59.06; Top Overlay "1" at 12790.16,4035.63 h59.06
Q2: Top Overlay "3" at 12980.32,2635.63 h59.06; Top Overlay "2" at 12880.32,2635.63 h59.06; Top Overlay "1" at 12790.16,2635.63 h59.06
Q3: Top Overlay "3" at 12980.32,1235.63 h59.06; Top Overlay "2" at 12880.32,1235.63 h59.06; Top Overlay "1" at 12790.16,1235.63 h59.06